# Altium PCB PCB1.PcbDoc (part 1 of 3)
Units mil, origin at the board's own origin, x right, y up, seen from the top; angles counter-clockwise.
Board outline 2830 x 1100 mil, 4 copper layers (L1, L2, L3, L4), stack 61.583 mil thick; 64 components, 73 nets, 315 pads, 162 vias.
Unrouted connection lines stored in the file: 1.
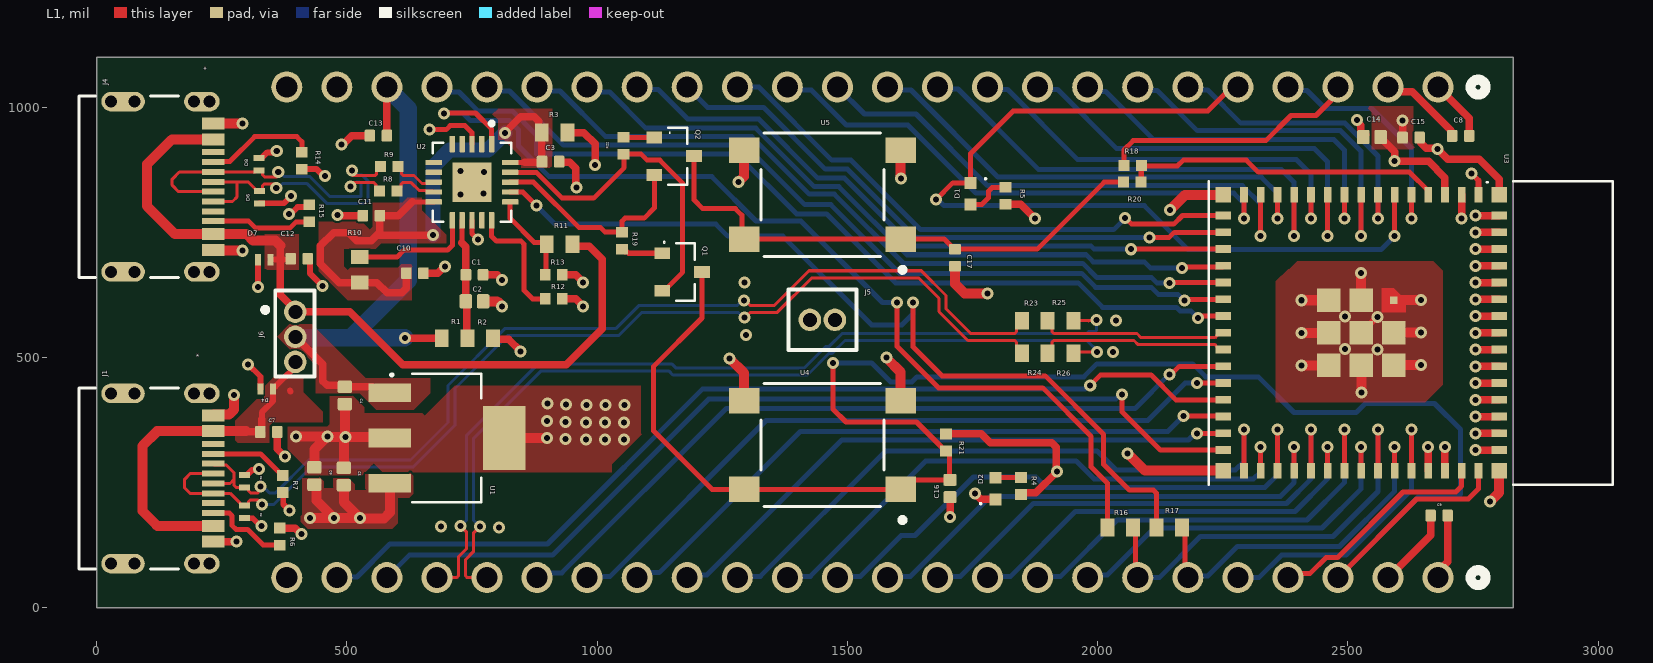
[diagram p0: L1 view]
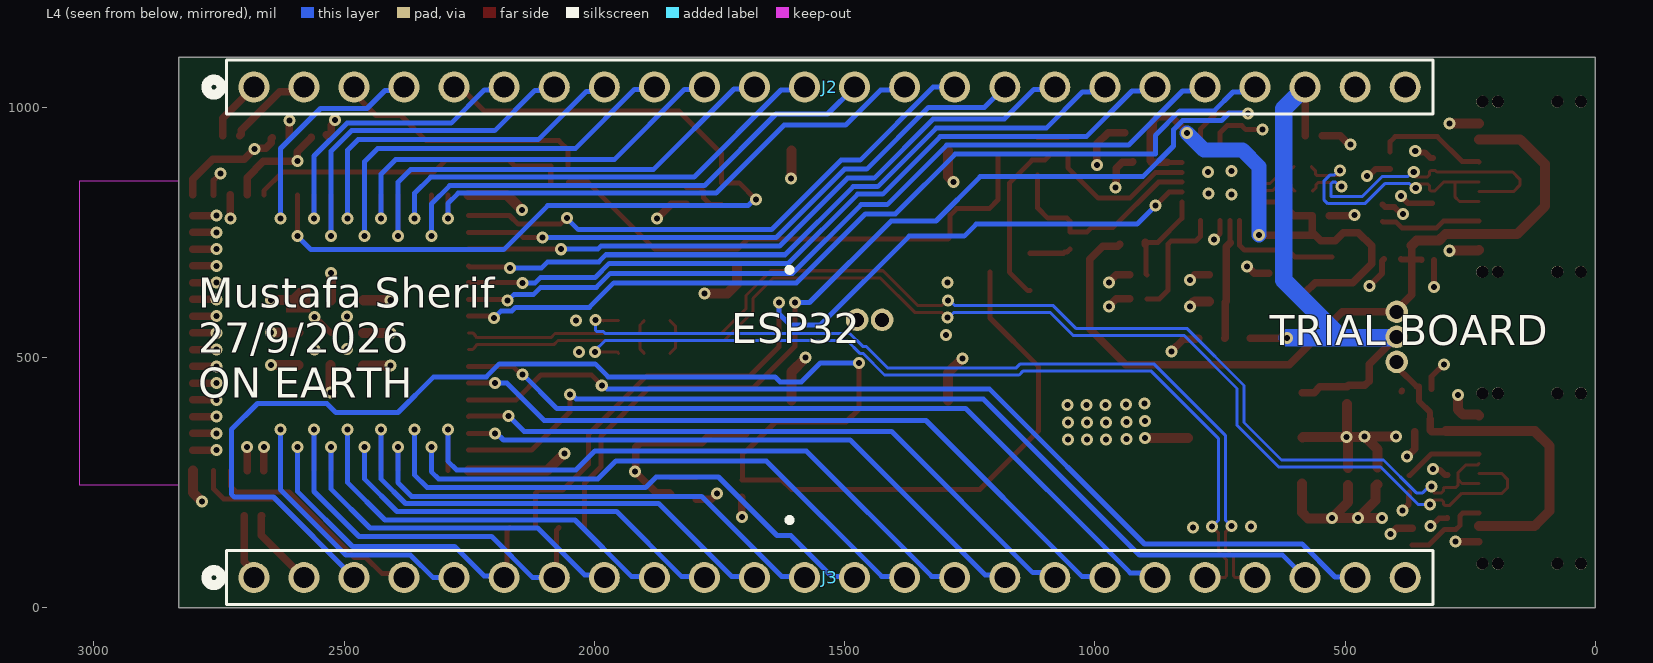
[diagram p1: L4 view, seen from below]
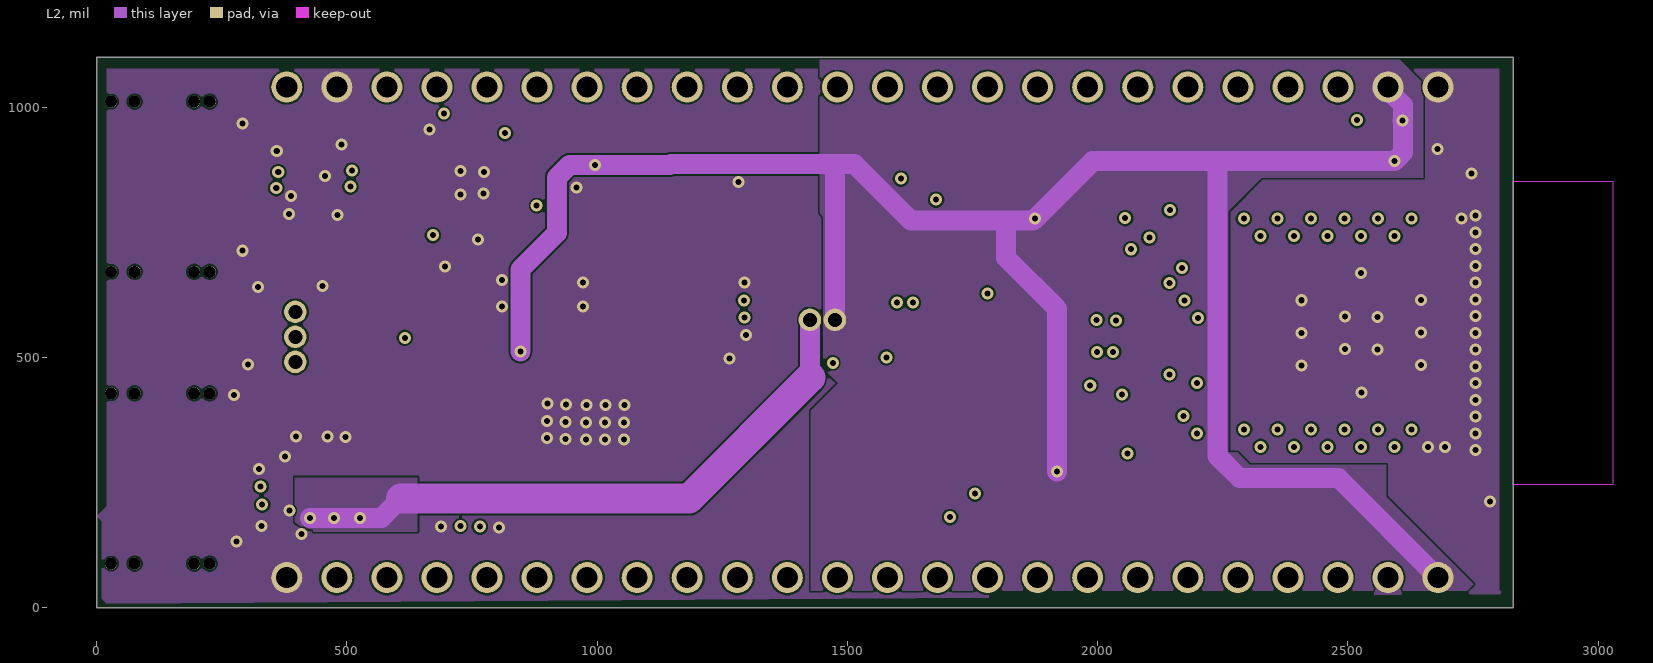
[diagram p2: L2]
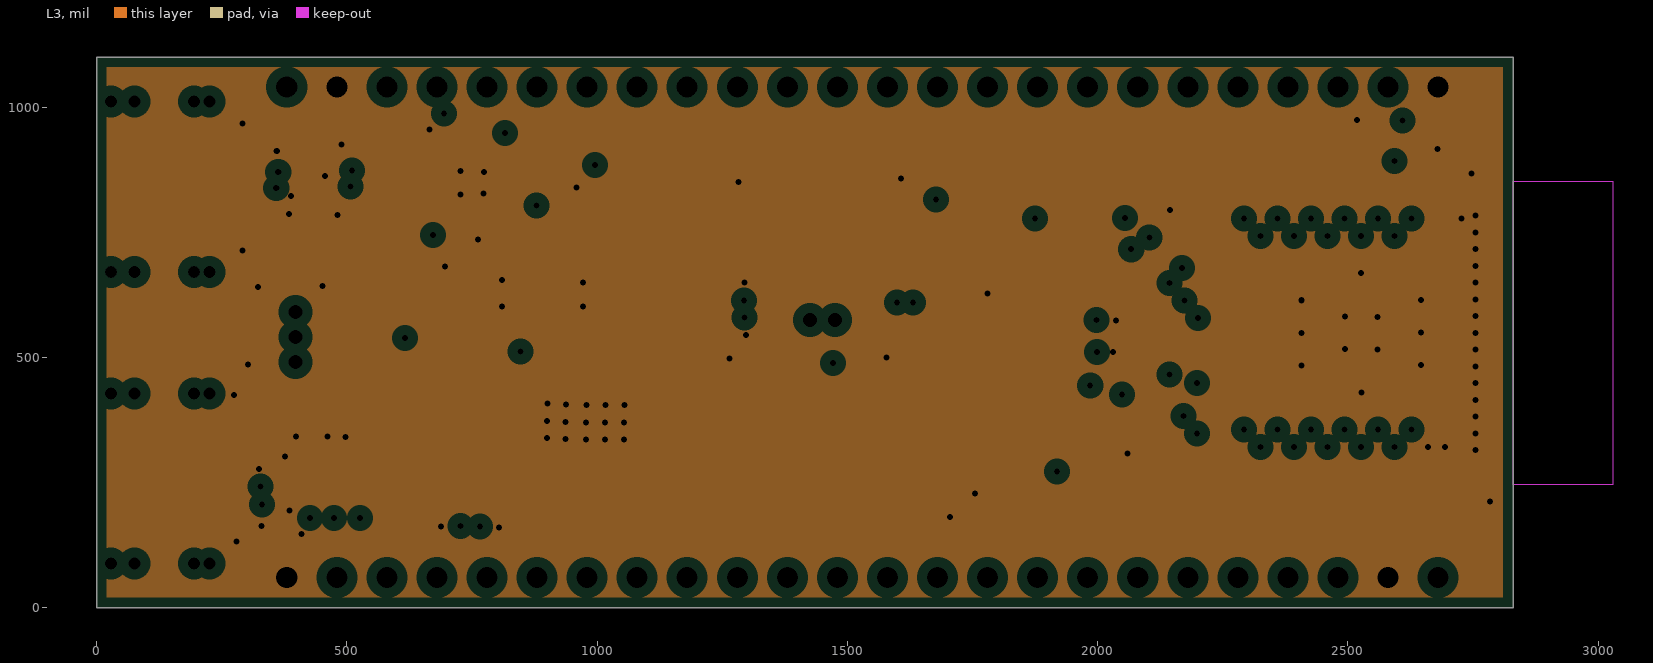
[diagram p3: L3, clearances drawn from the general rule]
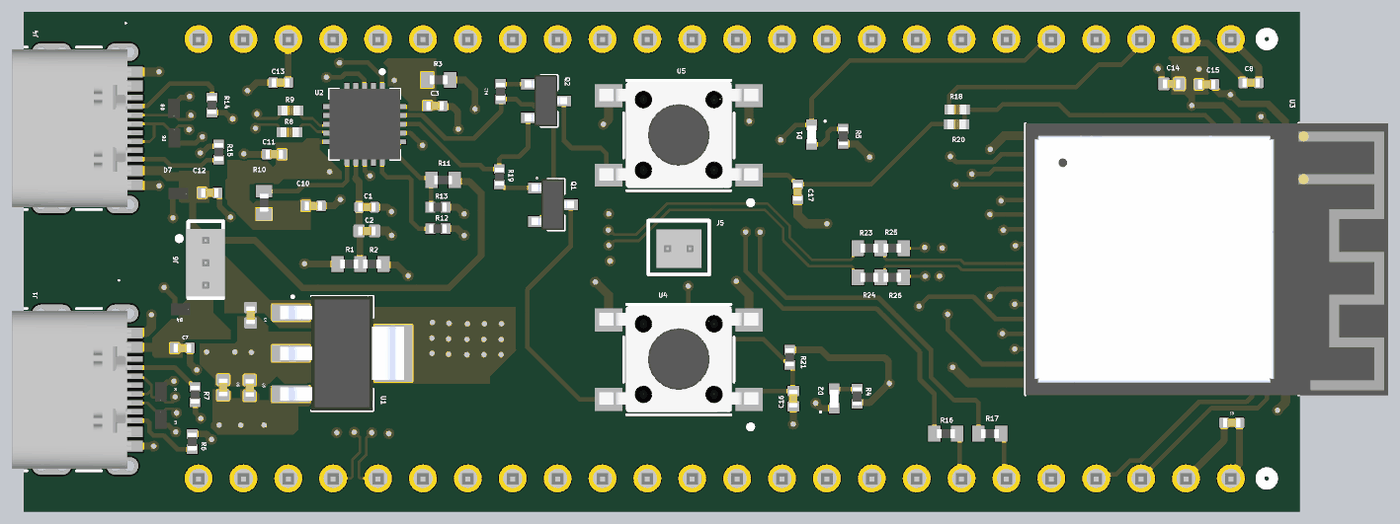
[diagram p4: 3D render of the assembled board from above, using the file's embedded part models]

## Layer stack, top to bottom
Top Solder: solder mask 0.4, Solder Resist, Dk 3.5
L1: signal copper 1.378
Dielectric 2: prepreg 3.9134, PP-006, Dk 4.1
L2: signal copper 0.5984
Dielectric 1: dielectric 49.8031, FR-4, Dk 4.8
L3: plane copper 0.5984, net GND
Dielectric 3: prepreg 3.9134, PP-006, Dk 4.1
L4: signal copper 1.378
Bottom Solder: solder mask 0.4, Solder Resist, Dk 3.5

## Board outline
0,0 2830,0 2830,1100 0,1100

## Design rules (kind name [scope] priority, off if disabled: settings)
Clearance [All] p1: gap=4 ignorepadtopadclearanceinfootprint=FALSE
DiffPairsRouting DIFF90 [InDifferentialPairClass('DIFF90')] p1: maxlimit=10 minlimit=8 mostfreqgap=10 toplayer_maxgap=8.1 toplayer_prefgap=8 toplayer_minwidth=6.03 toplayer_maxwidth=6.23 toplayer_prefwidth=6.03 midlayer1_mingap=10 midlayer1_minwidth=15 midlayer1_maxwidth=15 midlayer1_prefwidth=15 bottomlayer_maxgap=8.1 bottomlayer_prefgap=8 bottomlayer_minwidth=6.03 bottomlayer_maxwidth=6.23 bottomlayer_prefwidth=6.03 maxuncoupledlength=500
HoleToHoleClearance [All] p1: gap=6 allowstackedmicrovias=TRUE
MinimumSolderMaskSliver [All] p1: minsoldermaskwidth=4
PlaneClearance [All] p1: clearance=20
PlaneConnect [All] p1: pad.planeconnectstyle=Relief pad.reliefexpansion=20 pad.reliefentries=4 pad.reliefconductorwidth=10 pad.reliefairgap=10 via.planeconnectstyle=Direct via.reliefexpansion=20 via.reliefentries=4 via.reliefconductorwidth=10 via.reliefairgap=10
PolygonConnect [All] p1: connectstyle=Direct reliefconductorwidth=10 reliefentries=4 polygonreliefangle="90 Angle" airgapwidth=10
RoutingVias [All] p1: holewidth=12 width=24 viastyle="Through Hole" minholewidth=12 minwidth=24 maxholewidth=12 maxwidth=24
SilkToSolderMaskClearance [IsPad] p1: minsilkscreentomaskgap=6 clearancetoexposedcopper=TRUE
SolderMaskExpansion [All] p1: expansion=2 istentingtop=FALSE
Width [All] p1: maxlimit=100 minlimit=10 preferedwidth=10 minimp=50.000000 maximp=50.000000 favimp=50.000000
24 further rules are at their usual default settings.

## Classes and differential pairs
differential pair class DIFF90: CON1_USB CON2_USB CON_ESP_USB ESP_USB FTDI_USB
differential pair FTDI_USB: +FTDI_USB_P -FTDI_USB_N
differential pair ESP_USB: +ESP_USB_P -ESP_USB_N
differential pair CON_ESP_USB: +CON_ESP_USB_P -CON_ESP_USB_N
differential pair CON2_USB: +CON2_USB_P -CON2_USB_N
differential pair CON1_USB: +CON1_USB_P -CON1_USB_N

## Components (designator, comment, footprint, x,y, rotation, side; value= is the part's Value field where it differs from the comment)
C1 "100n" CAPC1005X55N 755,665 r180 top locked
C2 "4.7U" CAPC1005X70N#1 755,612 r180 top locked
C3 "100n" CAPC1005X55N 907,891 r180 top locked
C4 "4.7U" CAPC1005X70N#2 496,424 r90 top locked
C5 "10u" CAPC1005X90N 494,262 r270 top locked
C6 "10u" CAPC1005X90N 435,263 r270 top locked
C7 "100n" CAPC1005X55N 344,351 r180 top locked
C8 "100n" CAPC1005X55N 2725,942.36 r180 top locked
C9 "100n" CAPC1005X55N 2682,184 r0 top locked
C10 "100n" CAPC1005X55N 636,668 r180 top locked
C11 "100n" CAPC1005X55N 549,783 r0 top locked
C12 "100n" CAPC1005X55N 405,697 r180 top locked
C13 "100n" CAPC1005X55N 563,943 r0 top locked
C14 "10u" CAPC1005X90N 2548,940 r0 top locked
C15 "100n" CAPC1005X55N 2626,939 r180 top locked
C16 "1UF" CAPC1005X65N 1705,238 r90 top locked
C17 "100n" CAPC1005X55N 1715,699 r90 top locked
D1 "WL-SMCC_0402" WL-SMCC_0402 1746,827 r270 top locked
D2 "WL-SMCC_0402" WL-SMCC_0402 1796,238 r90 top locked
D3 "AQ3045-01ETG" TVS_SOD882_LTF 296,192 r270 top locked
D4 "AQ3045-01ETG" TVS_SOD882_LTF 340,437 r180 top locked
D5 "AQ3045-01ETG" TVS_SOD882_LTF 296,253 r90 top locked
D6 "AQ3045-01ETG" TVS_SOD882_LTF 326,820 r270 top locked
D7 "AQ3045-01ETG" TVS_SOD882_LTF 335,695 r180 top locked
D8 "AQ3045-01ETG" TVS_SOD882_LTF 325,886 r90 top locked
J1 "USBC-2171790001" USBC-2171790001 103,258 r270 top locked
J2 "22284245" CONN_SD-42375-001_M295_24_MOL 2680,1040 r0 bottom locked
J3 "22284245" CONN_SD-42375-001_M295_24_MOL 2680,60 r0 bottom locked
J4 "USBC-2171790001" USBC-2171790001 103.07,840.92 r270 top locked
J5 "SAMTEC-FTS-102-01-X-SJ" SAMTEC-FTS-102-01-X-S 1450,575 r0 top locked
J6 "SAMTEC-FTS-103-01-X-S" SAMTEC-FTS-103-01-X-S 397,541 r270 top locked
Q1 "SS8050-G" TRANS_SS8050-G 1169.76,670.6 r0 top locked
Q2 "SS8050-G" TRANS_SS8050-G 1154,902 r0 top locked
R1 "0R" RESC1005X40 715.41,538 r0 top locked value="0 ohms"
R2 "0R" RESC1005X40 766.59,538 r180 top locked value="0 ohms"
R3 "0R" RESC1005X40 915,949 r0 top locked value="0 ohms"
R4 "1K" RESC1005X40N 1847,243 r270 top locked
R5 "1K" RESC1005X40N 1816,823 r270 top locked
R6 "AC0402FR-075K1L" 5k1 366,142 r270 top locked
R7 "AC0402FR-075K1L" 5k1 372,247 r90 top locked
R8 "27R" RES_RC0402_YAG 583,832 r0 top locked
R9 "27R" RES_RC0402_YAG 585,881 r0 top locked
R10 "0R" RESC1005X40 526,675 r90 top locked value="0 ohms"
R11 "4K7" "RESC1005X40 - duplicate" 925,726 r0 top locked
R12 "10K" RESC1005X37N 913.27,617 r180 top locked
R13 "10K" RESC1005X37N 913.27,665 r180 top locked
R14 "AC0402FR-075K1L" 5k1 410,893 r90 top locked
R15 "AC0402FR-075K1L" 5k1 425,788 r270 top locked
R16 "0R" RESC1005X40 2045,160 r180 top locked value="0 ohms"
R17 "0R" RESC1005X40 2143,160 r180 top locked value="0 ohms"
R18 "27R" RES_RC0402_YAG 2070,883 r0 top locked
R19 "10K" RESC1005X37N 1050,733 r270 top locked
R20 "27R" RES_RC0402_YAG 2069,850 r0 top locked
R21 "10K" RESC1005X37N 1697,330 r90 top locked
R22 "10K" RESC1005X37N 1053,923 r90 top locked
R23 "0R" RESC1005X40 1874.21,573.2 r0 top locked value="0 ohms"
R24 "0R" RESC1005X40 1874.21,508.2 r0 top locked value="0 ohms"
R25 "0R" RESC1005X40 1925.95,573.2 r180 top locked value="0 ohms"
R26 "0R" RESC1005X40 1925.95,508.2 r180 top locked value="0 ohms"
U1 "TL1963A-33DCYR" VREG_TL1963A-33DCYR 700,339 r0 top locked
U2 "FT231XQ-R" QFN50P400X400X80-21N 750,850 r270 top locked
U3 "ESP32-S3-MINI-1-N8" ESP32-S3-MINI-1-N8 2526.41,549.14 r270 top locked
U4 "PTS645SM43SMTR92LFS" SWITCH_43SMTR92LFS 1450,325 r180 top locked
U5 "PTS645SM43SMTR92LFS" SWITCH_43SMTR92LFS 1450,825 r180 top locked

## Footprints (in the part's own frame and the unit in brackets; to place one, negate y for a bottom-side part, rotate by r counter-clockwise, add the part's x,y. Pads: shape width x height; smd on the part's side, far side on the other; paste and mask are expansions set on the pad)
5k1 [mm]
  rect 0.54x0.6 smd: 1(-0.432,0) 2(0.432,0)
  body extent -0.5,-0.25 0.5,0.25, height 0.37
CAPC1005X55N [mm]
  rrect25% 0.54x0.6 smd: 1(-0.432,0) 2(0.432,0)
  body extent -0.5,-0.25 0.5,0.25, height 0.55
CAPC1005X65N [mm]
  rrect25% 0.6x0.67 smd: 1(-0.437,0) 2(0.437,0)
  body extent -0.5,-0.25 0.5,0.25, height 0.65
CAPC1005X70N#1 [mm]
  rrect25% 0.64x0.72 smd paste+0 mask+0.025: 1(-0.439,0) 2(0.439,0)
  body extent -0.5,-0.25 0.5,0.25, height 0.7
CAPC1005X70N#2 [mm]
  rrect25% 0.64x0.72 smd paste+0 mask+0: 1(-0.439,0) 2(0.439,0)
  body extent -0.5,-0.25 0.5,0.25, height 0.7
CAPC1005X90N [mm]
  rrect25% 0.64x0.72 smd: 1(-0.439,0) 2(0.439,0)
  body extent -0.5,-0.25 0.5,0.25, height 0.9
CONN_SD-42375-001_M295_24_MOL [mil]
  round 62 hole 42: 1(0,0) 2(-100,0) 3(-200,0) 4(-300,0) 5(-400,0) 6(-500,0) 7(-600,0) 8(-700,0) 9(-800,0) 10(-900,0) 11(-1000,0) 12(-1100,0) 13(-1200,0) 14(-1300,0) 15(-1400,0) 16(-1500,0) 17(-1600,0) 18(-1700,0) 19(-1800,0) 20(-1900,0) 21(-2000,0) 22(-2100,0) 23(-2200,0) 24(-2300,0)
  silkscreen extent -2355,-54 95,54, body extent -2350,-48 50,50, height 387
ESP32-S3-MINI-1-N8 [mm]
  rect 0.8x0.4 smd: 1(-7,5.95) 2(-7,5.1) 3(-7,4.25) 4(-7,3.4) 5(-7,2.55) 6(-7,1.7) 7(-7,0.85) 8(-7,0) 9(-7,-0.85) 10(-7,-1.7) 11(-7,-2.55) 12(-7,-3.4) 13(-7,-4.25) 14(-7,-5.1) 15(-7,-5.95) 31(7,-5.95) 32(7,-5.1) 33(7,-4.25) 34(7,-3.4) 35(7,-2.55) 36(7,-1.7) 37(7,-0.85) 38(7,0) 39(7,0.85) 40(7,1.7) 41(7,2.55) 42(7,3.4) 43(7,4.25) 44(7,5.1) 45(7,5.95)
  rect 0.4x0.8 smd: 16(-5.95,-7) 17(-5.1,-7) 18(-4.25,-7) 19(-3.4,-7) 20(-2.55,-7) 21(-1.7,-7) 22(-0.85,-7) 23(0,-7) 24(0.85,-7) 25(1.7,-7) 26(2.55,-7) 27(3.4,-7) 28(4.25,-7) 29(5.1,-7) 30(5.95,-7) 46(5.95,7) 47(5.1,7) 48(4.25,7) 49(3.4,7) 50(2.55,7) 51(1.7,7) 52(0.85,7) 53(0,7) 54(-0.85,7) 55(-1.7,7) 56(-2.55,7) 57(-3.4,7) 58(-4.25,7) 59(-5.1,7) 60(-5.95,7)
  rect 1.2x1.2 smd: 61(0,0) 61_2(0,1.65) 61_3(1.65,1.65) 61_4(1.65,0) 61_5(1.65,-1.65) 61_6(0,-1.65) 61_7(-1.65,-1.65) 61_8(-1.65,0)
  rect 0.4x0.4 smd paste-1 mask+0: 61_1(-1.65,1.65)
  rect 0.8x0.8 smd: 62(-7,7) 63(-7,-7) 64(7,-7) 65(7,7)
  L1 region: -1.05,1.05 -2.25,1.05 -2.25,1.65 -1.65,2.25 -1.05,2.25
  Keep-Out Layer region: 7.7,7.725 -7.7,7.725 -7.7,12.775 7.7,12.775
  Keep-Out Layer region: 7.7,7.725 -7.7,7.725 -7.7,12.775 7.7,12.775
  silkscreen extent -7.7,-7.73 7.7,12.78, body extent -7.7,-7.71 7.7,12.79, height 2.55
QFN50P400X400X80-21N [mm]
  rrect25% 0.84x0.27 smd: 1(-1.935,1) 2(-1.935,0.5) 3(-1.935,0) 4(-1.935,-0.5) 5(-1.935,-1) 11(1.935,-1) 12(1.935,-0.5) 13(1.935,0) 14(1.935,0.5) 15(1.935,1)
  rrect25% 0.27x0.84 smd: 6(-1,-1.935) 7(-0.5,-1.935) 8(0,-1.935) 9(0.5,-1.935) 10(1,-1.935) 16(1,1.935) 17(0.5,1.935) 18(0,1.935) 19(-0.5,1.935) 20(-1,1.935)
  rect 2x2 smd paste-0.37: 21(0,0)
  silkscreen extent -3.07,-2 2,2, body extent -2,-2 2,2, height 0.78
RES_RC0402_YAG [mil]
  rect 22x22 smd paste+0 mask+0: 1(-17.5,0) 2(17.5,0)
  body extent -21,-11 21,11, height 16
RESC1005X37N [mm]
  rect 0.54x0.6 smd: 1(-0.432,0) 2(0.432,0)
  body extent -0.5,-0.25 0.5,0.25, height 0.37
RESC1005X40 [mm]
  rect 0.7x0.9 smd: 1(-0.65,0) 2(0.65,0)
  body extent -0.5,-0.25 0.5,0.25, height 0.4
"RESC1005X40 - duplicate" [mm]
  rect 0.7x0.9 smd: 1(-0.65,0) 2(0.65,0)
  body extent -0.5,-0.25 0.5,0.25, height 0.4
RESC1005X40N [mm]
  rect 0.54x0.6 smd: 1(-0.43,0) 2(0.43,0)
  body extent -0.5,-0.25 0.5,0.25, height 0.4
SAMTEC-FTS-102-01-X-S [mil]
  round 45 hole 27.95 mask+4: 1(-25,0) 2(25,0)
  silkscreen extent -68,-60 68,60, body extent -50,-45 50,40, height 154
SAMTEC-FTS-103-01-X-S [mil]
  round 45 hole 27.95 mask+0: 1(-50,0) 2(0,0) 3(50,0)
  silkscreen extent -93,-65 79,38, body extent -75,-44 75,42, height 154
SWITCH_43SMTR92LFS [mil]
  rect 61x51 smd paste+0 mask+0: 1(-156.5,88.58) 2(156.5,88.58) 3(-156.5,-88.58) 4(156.5,-88.58)
  silkscreen extent -165,-123 123,155, body extent -177,-119 177,117, height 169
TRANS_SS8050-G [mm]
  rect 0.8x0.6 smd: 1(-1.01,0.95) 2(-1.01,-0.95) 3(1.01,0)
  silkscreen extent -0.95,-1.45 0.65,1.55, body extent -1.2,-1.44 1.2,1.46, height 1.14
TVS_SOD882_LTF [mil]
  rect 12x22 smd paste+0 mask+0: 1(-12.5,0) 2(12.5,0)
  body extent -21,-13 21,13, height 22
USBC-2171790001 [mil]
  oval 39x87 smd paste+0 mask+4.02: 13(-170.08,-50.07) 14(170.08,-50.07)
  oval 39x71 smd paste+0 mask+4.02: 15(-170.08,107.41) 16(170.08,107.41)
  rect 24x45 smd paste+0 mask+4.02: A1/B12(-125.98,130.05) A4/B9(-94.49,130.05) B1/A12(125.98,130.05) B4/A9(94.49,130.05)
  rect 12x45 smd paste+0 mask+4.02: A5(-49.21,130.05) A6(-9.84,130.05) A7(9.84,130.05) A8(49.21,130.05) B5(68.9,130.05) B6(29.53,130.05) B7(-29.53,130.05) B8(-68.9,130.05)
  round 24 hole 24 unplated mask+0: ""(-170,92) ""(-170,123) ""(-170,-74) ""(-170,-27) ""(170,92) ""(170,123) ""(170,-74) ""(170,-27)
  silkscreen extent -181,-138 181,61, body extent -176,-138 176,128, height 128
VREG_TL1963A-33DCYR [mm]
  rect 2.15x0.95 smd: 1(-2.9,2.3) 2(-2.9,0) 3(-2.9,-2.3)
  rect 2.15x3.25 smd: 4(2.9,0)
  silkscreen extent -2.83,-3.25 1.75,3.25, body extent -3.5,-3.25 3.5,3.25, height 1.8
WL-SMCC_0402 [mm]
  rect 0.6x0.6 smd: 1(-0.55,0) 2(0.55,0)
  silkscreen extent -0.76,0.76 -0.76,0.76, body extent -0.5,-0.25 0.5,0.25, height 0.25

## Part data
C1 C3 C7 C8 C9 C10 C11 C12 C13 C15 C17: library part CL05B104KB54PNC, "CAP CER 0.1UF 50V X7R 0402 SMD", Capacitance=100nF, Case/Package=0402, Dielectric Material=Ceramic, Manufacturer="Samsung Electro-Mechanics", Max Operating Temperature=125°C, Min Operating Temperature=-55°C, Package="SMD-2 Samsung", Ratings=AEC-Q200, Tolerance=10%, Voltage Rating=50V, Category="Ceramic Capacitors", Check_prices=https://www.snapeda.com/parts/CL05B104KB54PNC/Samsung/view-part/?ref=eda, China RoHS=Compliant, ComponentLink1Description=https://datasheet.octopart.com:443/CL05B104KB54PNC-Samsung-Electro-Mechanics-datasheet-182018727.pdf?src-supplier=IHS, ComponentLink1URL=https://datasheet.octopart.com:443/CL05B104KB54PNC-Samsung-Electro-Mechanics-datasheet-182018727.pdf?src-supplier=IHS, ComponentLink2Description=https://datasheet.octopart.com:443/CL05B104KB54PNC-Samsung-Electro-Mechanics-datasheet-138685816.pdf?src-supplier=Samsung+SCT, ComponentLink2URL=https://datasheet.octopart.com:443/CL05B104KB54PNC-Samsung-Electro-Mechanics-datasheet-138685816.pdf?src-supplier=Samsung+SCT, ComponentLink3Description=https://datasheet.octopart.com:443/CL05B104KB54PNC-Samsung-datasheet-8326407.pdf?src-supplier=TME, ComponentLink3URL=https://datasheet.octopart.com:443/CL05B104KB54PNC-Samsung-datasheet-8326407.pdf?src-supplier=TME, Country of Origin="Mainland China, Philippines, South Korea", Export Control Classification Number (ECCN) Code=EAR99, Harmonized Tariff Schedule (HTS) Code=8532.24.00.20, Height=500µm, Introduction Date=2018-07-31, Length=1mm, Lifecycle Status=Production, Manufacturer Part Number=CL05B104KB54PNC, Material=Ceramic, MF="Samsung Electro-Mechanics", Mount="Surface Mount", MP=CL05B104KB54PNC, Number of Terminals=2, Pricing 1="10000=0.0126, 20000=0.0124, 40000=0.0123, 50000=0.0122, 150000=0.0118 (USD)", REACH SVHC=Yes, RoHS=Compliant, Schedule B="8532240020, 8532240020|8532240020|8532240020|8532240020|8532240020|8532240020|8532240020|8532240020|8532240020|8532240020|8532240020|8532240020|8532240020|8532240020|8532240020|8532240020|8532240020|8532240020|8532240020|8532240020|8532240020|8532240020|8532240020|85", SnapEDA_Link=https://www.snapeda.com/parts/CL05B104KB54PNC/Samsung/view-part/?ref=snap, Stock 1=1410000, Supplier 1="Future Electronics", Voltage Rating (DC)=50V, Width=500µm
C2 C4: library part 4.7uf-CL05A475MO5NUNC, "16V 4.7uF X5R 卤20% 0402 Multilayer Ceramic Capacitors MLCC - SMD/SMT ROHS", Capacitance=4.7µF, Case Code (Imperial)=0402, Case Code (Metric)=1005, Dielectric=X5R, Dielectric Material=Ceramic, Manufacturer="Samsung Electro-Mechanics", Manufacturer Part Number=CL05A475MO5NUNC, Max Operating Temperature=85°C, Min Operating Temperature=-55°C, Package="SMD-2 Samsung", Tolerance=20%, Voltage Rating=16V, Case/Package=0402, Category="Ceramic Capacitors", Check_prices=https://www.snapeda.com/parts/CL05A475MO5NUNC/Samsung/view-part/?ref=eda, China RoHS=Compliant, ComponentLink1Description=https://datasheet.octopart.com:443/CL05A475MO5NUNC-Samsung-Electro-Mechanics-datasheet-178175196.pdf?src-supplier=Farnell, ComponentLink1URL=https://datasheet.octopart.com:443/CL05A475MO5NUNC-Samsung-Electro-Mechanics-datasheet-178175196.pdf?src-supplier=Farnell, ComponentLink2Description=https://datasheet.octopart.com:443/CL05A475MO5NUNC-Samsung-Electro-Mechanics-datasheet-123102911.pdf?src-supplier=Future+Electronics, ComponentLink2URL=https://datasheet.octopart.com:443/CL05A475MO5NUNC-Samsung-Electro-Mechanics-datasheet-123102911.pdf?src-supplier=Future+Electronics, ComponentLink3Description=https://datasheet.octopart.com:443/CL05A475MO5NUNC-Samsung-Electro-Mechanics-datasheet-110226225.pdf?src-supplier=Future+Electronics, ComponentLink3URL=https://datasheet.octopart.com:443/CL05A475MO5NUNC-Samsung-Electro-Mechanics-datasheet-110226225.pdf?src-supplier=Future+Electronics, ComponentLink4Description=https://datasheet.octopart.com:443/CL05A475MO5NUNC-Samsung-Electro-Mechanics-datasheet-83567908.pdf?src-supplier=Future+Electronics, ComponentLink4URL=https://datasheet.octopart.com:443/CL05A475MO5NUNC-Samsung-Electro-Mechanics-datasheet-83567908.pdf?src-supplier=Future+Electronics, ComponentLink5Description=https://datasheet.octopart.com:443/CL05A475MO5NUNC-Samsung-Electro-Mechanics-datasheet-68297032.pdf?src-supplier=Future+Electronics, ComponentLink5URL=https://datasheet.octopart.com:443/CL05A475MO5NUNC-Samsung-Electro-Mechanics-datasheet-68297032.pdf?src-supplier=Future+Electronics, ComponentLink6Description=https://datasheet.octopart.com:443/CL05A475MO5NUNC-Samsung-Electro-Mechanics-datasheet-87580057.pdf?src-supplier=Future+Electronics, ComponentLink6URL=https://datasheet.octopart.com:443/CL05A475MO5NUNC-Samsung-Electro-Mechanics-datasheet-87580057.pdf?src-supplier=Future+Electronics, ComponentLink7Description=https://datasheet.octopart.com:443/CL05A475MO5NUNC-Samsung-Electro-Mechanics-datasheet-149136694.pdf?src-supplier=Future+Electronics, ComponentLink7URL=https://datasheet.octopart.com:443/CL05A475MO5NUNC-Samsung-Electro-Mechanics-datasheet-149136694.pdf?src-supplier=Future+Electronics, Height=500µm, Length=1mm, Lifecycle Status=Production, Material=Ceramic, MF=Samsung, Mount="Surface Mount", MP=CL05A475MO5NUNC, Number of Terminals=2, Pricing 1="10000=0.665 (USD)", REACH SVHC=Yes, RoHS=Compliant, Schedule B="8532240020, 8532240020|8532240020, 8532240020|8532240020|8532240020, 8532240020|8532240020|8532240020|8532240020", SnapEDA_Link=https://www.snapeda.com/parts/CL05A475MO5NUNC/Samsung/view-part/?ref=snap, Stock 1=50000, Supplier 1="Future Electronics", Thickness=558.8µm, Voltage Rating (DC)=16V, Width=500µm
C5 C6: library part 10UF, "CL05A106MP8NUB8-CAP CER 10UF 10V X5R 0402 SMD", Capacitance=10µF, Case Code (Imperial)=0402, Case Code (Metric)=1005, Dielectric Material=Ceramic, Manufacturer="Samsung Electro-Mechanics", Manufacturer Part Number=CL05A106MP8NUB8, Max Operating Temperature=85°C, Min Operating Temperature=-55°C, Package="SMD-2 Samsung", Tolerance=20%, Voltage Rating=10V, Case/Package=0402, Category="Ceramic Capacitors", Check_prices=https://www.snapeda.com/parts/CL05A106MP8NUB8/Samsung/view-part/?ref=eda, China RoHS=Compliant, ComponentLink1Description=https://datasheet.octopart.com:443/CL05A106MP8NUB8-Samsung-Electro-Mechanics-datasheet-136460857.pdf?src-supplier=IHS, ComponentLink1URL=https://datasheet.octopart.com:443/CL05A106MP8NUB8-Samsung-Electro-Mechanics-datasheet-136460857.pdf?src-supplier=IHS, ComponentLink2Description=https://datasheet.octopart.com:443/CL05A106MP8NUB8-Samsung-Electro-Mechanics-datasheet-181551178.pdf?src-supplier=Newark, ComponentLink2URL=https://datasheet.octopart.com:443/CL05A106MP8NUB8-Samsung-Electro-Mechanics-datasheet-181551178.pdf?src-supplier=Newark, ComponentLink3Description=https://datasheet.octopart.com:443/CL05A106MP8NUB8-Samsung-Electro-Mechanics-datasheet-136031724.pdf?src-supplier=Newark, ComponentLink3URL=https://datasheet.octopart.com:443/CL05A106MP8NUB8-Samsung-Electro-Mechanics-datasheet-136031724.pdf?src-supplier=Newark, ComponentLink4Description=https://datasheet.octopart.com:443/CL05A106MP8NUB8-Samsung-Electro-Mechanics-datasheet-141346815.pdf?src-supplier=Samsung+SCT, ComponentLink4URL=https://datasheet.octopart.com:443/CL05A106MP8NUB8-Samsung-Electro-Mechanics-datasheet-141346815.pdf?src-supplier=Samsung+SCT, ComponentLink5Description=https://datasheet.octopart.com:443/CL05A106MP8NUB8-Samsung-Electro-Mechanics-datasheet-110326781.pdf?src-supplier=Future+Electronics, ComponentLink5URL=https://datasheet.octopart.com:443/CL05A106MP8NUB8-Samsung-Electro-Mechanics-datasheet-110326781.pdf?src-supplier=Future+Electronics, ComponentLink6Description=https://datasheet.octopart.com:443/CL05A106MP8NUB8-Samsung-Electro-Mechanics-datasheet-96443587.pdf?src-supplier=Future+Electronics, ComponentLink6URL=https://datasheet.octopart.com:443/CL05A106MP8NUB8-Samsung-Electro-Mechanics-datasheet-96443587.pdf?src-supplier=Future+Electronics, ComponentLink7Description=https://datasheet.octopart.com:443/CL05A106MP8NUB8-Samsung-Electro-Mechanics-datasheet-68297032.pdf?src-supplier=Future+Electronics, ComponentLink7URL=https://datasheet.octopart.com:443/CL05A106MP8NUB8-Samsung-Electro-Mechanics-datasheet-68297032.pdf?src-supplier=Future+Electronics, ComponentLink8Description=https://datasheet.octopart.com:443/CL05A106MP8NUB8-Samsung-Electro-Mechanics-datasheet-86032222.pdf?src-supplier=Future+Electronics, ComponentLink8URL=https://datasheet.octopart.com:443/CL05A106MP8NUB8-Samsung-Electro-Mechanics-datasheet-86032222.pdf?src-supplier=Future+Electronics, Country of Origin="Mainland China, Philippines, South Korea", Export Control Classification Number (ECCN) Code=EAR99, Harmonized Tariff Schedule (HTS) Code=8532.24.00.20, Height=800µm, Introduction Date=2014-02-27, Length=1mm, Lifecycle Status=Production, Material=Ceramic, MF="Samsung Electro-Mechanics", Mount="Surface Mount", MP=CL05A106MP8NUB8, Number of Terminals=2, Pricing 1="8000=0.245 (USD)", REACH SVHC=Yes, RoHS=Compliant, Schedule B="8532240020, 8532240020|8532240020, 8532240020|8532240020|8532240020, 8532240020|8532240020|8532240020|8532240020", SnapEDA_Link=https://www.snapeda.com/parts/CL05A106MP8NUB8/Samsung/view-part/?ref=snap, Stock 1=264000, Supplier 1="Future Electronics", Thickness=889µm, Voltage Rating (DC)=10V, Width=500µm
C14: library part CL05A106MP8NUB8, "CAP CER 10UF 10V X5R 0402 SMD", Capacitance=10µF, Case Code (Imperial)=0402, Case Code (Metric)=1005, Dielectric Material=Ceramic, Manufacturer="Samsung Electro-Mechanics", Max Operating Temperature=85°C, Min Operating Temperature=-55°C, Package="SMD-2 Samsung", Tolerance=20%, Voltage Rating=10V, Case/Package=0402, Category="Ceramic Capacitors", Check_prices=https://www.snapeda.com/parts/CL05A106MP8NUB8/Samsung/view-part/?ref=eda, China RoHS=Compliant, ComponentLink1Description=https://datasheet.octopart.com:443/CL05A106MP8NUB8-Samsung-Electro-Mechanics-datasheet-136460857.pdf?src-supplier=IHS, ComponentLink1URL=https://datasheet.octopart.com:443/CL05A106MP8NUB8-Samsung-Electro-Mechanics-datasheet-136460857.pdf?src-supplier=IHS, ComponentLink2Description=https://datasheet.octopart.com:443/CL05A106MP8NUB8-Samsung-Electro-Mechanics-datasheet-181551178.pdf?src-supplier=Newark, ComponentLink2URL=https://datasheet.octopart.com:443/CL05A106MP8NUB8-Samsung-Electro-Mechanics-datasheet-181551178.pdf?src-supplier=Newark, ComponentLink3Description=https://datasheet.octopart.com:443/CL05A106MP8NUB8-Samsung-Electro-Mechanics-datasheet-136031724.pdf?src-supplier=Newark, ComponentLink3URL=https://datasheet.octopart.com:443/CL05A106MP8NUB8-Samsung-Electro-Mechanics-datasheet-136031724.pdf?src-supplier=Newark, ComponentLink4Description=https://datasheet.octopart.com:443/CL05A106MP8NUB8-Samsung-Electro-Mechanics-datasheet-141346815.pdf?src-supplier=Samsung+SCT, ComponentLink4URL=https://datasheet.octopart.com:443/CL05A106MP8NUB8-Samsung-Electro-Mechanics-datasheet-141346815.pdf?src-supplier=Samsung+SCT, ComponentLink5Description=https://datasheet.octopart.com:443/CL05A106MP8NUB8-Samsung-Electro-Mechanics-datasheet-110326781.pdf?src-supplier=Future+Electronics, ComponentLink5URL=https://datasheet.octopart.com:443/CL05A106MP8NUB8-Samsung-Electro-Mechanics-datasheet-110326781.pdf?src-supplier=Future+Electronics, ComponentLink6Description=https://datasheet.octopart.com:443/CL05A106MP8NUB8-Samsung-Electro-Mechanics-datasheet-96443587.pdf?src-supplier=Future+Electronics, ComponentLink6URL=https://datasheet.octopart.com:443/CL05A106MP8NUB8-Samsung-Electro-Mechanics-datasheet-96443587.pdf?src-supplier=Future+Electronics, ComponentLink7Description=https://datasheet.octopart.com:443/CL05A106MP8NUB8-Samsung-Electro-Mechanics-datasheet-68297032.pdf?src-supplier=Future+Electronics, ComponentLink7URL=https://datasheet.octopart.com:443/CL05A106MP8NUB8-Samsung-Electro-Mechanics-datasheet-68297032.pdf?src-supplier=Future+Electronics, ComponentLink8Description=https://datasheet.octopart.com:443/CL05A106MP8NUB8-Samsung-Electro-Mechanics-datasheet-86032222.pdf?src-supplier=Future+Electronics, ComponentLink8URL=https://datasheet.octopart.com:443/CL05A106MP8NUB8-Samsung-Electro-Mechanics-datasheet-86032222.pdf?src-supplier=Future+Electronics, Country of Origin="Mainland China, Philippines, South Korea", Export Control Classification Number (ECCN) Code=EAR99, Harmonized Tariff Schedule (HTS) Code=8532.24.00.20, Height=800µm, Introduction Date=2014-02-27, Length=1mm, Lifecycle Status=Production, Manufacturer Part Number=CL05A106MP8NUB8, Material=Ceramic, MF="Samsung Electro-Mechanics", Mount="Surface Mount", MP=CL05A106MP8NUB8, Number of Terminals=2, Pricing 1="8000=0.245 (USD)", REACH SVHC=Yes, RoHS=Compliant, Schedule B="8532240020, 8532240020|8532240020, 8532240020|8532240020|8532240020, 8532240020|8532240020|8532240020|8532240020", SnapEDA_Link=https://www.snapeda.com/parts/CL05A106MP8NUB8/Samsung/view-part/?ref=snap, Stock 1=264000, Supplier 1="Future Electronics", Thickness=889µm, Voltage Rating (DC)=10V, Width=500µm
C16: "35V 1uF X5R 卤10% 0402 Multilayer Ceramic Capacitors MLCC - SMD/SMT ROHS", Capacitance=1µF, Case Code (Imperial)=0402, Case Code (Metric)=1005, Dielectric Material=Ceramic, Manufacturer="Samsung Electro-Mechanics", Manufacturer Part Number=CL05A105KL5NRNC, Max Operating Temperature=85°C, Min Operating Temperature=-55°C, Package="SMD-2 Samsung", Tolerance=10%, Voltage Rating=35V, Case/Package=0402, Category="Ceramic Capacitors", Check_prices=https://www.snapeda.com/parts/CL05A105KL5NRNC/Samsung/view-part/?ref=eda, China RoHS=Compliant, ComponentLink1Description=https://datasheet.octopart.com:443/CL05A105KL5NRNC-Samsung-Electro-Mechanics-datasheet-182018568.pdf?src-supplier=IHS, ComponentLink1URL=https://datasheet.octopart.com:443/CL05A105KL5NRNC-Samsung-Electro-Mechanics-datasheet-182018568.pdf?src-supplier=IHS, ComponentLink2Description=https://datasheet.octopart.com:443/CL05A105KL5NRNC-Samsung-Electro-Mechanics-datasheet-141346806.pdf?src-supplier=Samsung+SCT, ComponentLink2URL=https://datasheet.octopart.com:443/CL05A105KL5NRNC-Samsung-Electro-Mechanics-datasheet-141346806.pdf?src-supplier=Samsung+SCT, ComponentLink3Description=https://datasheet.octopart.com:443/CL05A105KL5NRNC-Samsung-datasheet-8326407.pdf?src-supplier=TME, ComponentLink3URL=https://datasheet.octopart.com:443/CL05A105KL5NRNC-Samsung-datasheet-8326407.pdf?src-supplier=TME, Country of Origin="Mainland China, Philippines, South Korea", Export Control Classification Number (ECCN) Code=EAR99, Harmonized Tariff Schedule (HTS) Code=8532.24.00.20, Height=550µm, Introduction Date=2013-03-18, Length=990.6µm, Lifecycle Status=Production, Material=Ceramic, MF=Samsung, Mount="Surface Mount", MP=CL05A105KL5NRNC, Number of Terminals=2, Pricing 1="10000=0.172 (USD)", REACH SVHC=Yes, RoHS=Compliant, Schedule B="8532240020, 8532240020|8532240020|8532240020|8532240020|8532240020", SnapEDA_Link=https://www.snapeda.com/parts/CL05A105KL5NRNC/Samsung/view-part/?ref=snap, Stock 1=20000, Supplier 1="Future Electronics", Thickness=558.8µm, Voltage Rating (DC)=35V, Width=508µm
D1 D2: "LED, GREEN, 60MCD, 573NM, 0402; LED Colour:Green; LED Mounting:SMD; Forward Current If:20mA; Forward Voltage:2V; Wavelength Typ:573nm; Luminous Intensity:60mcd; Viewing Angle:120Â°; Lens Shape:Rectangular; Product Range:WL-SMCC Series; Automotive Qualific", Package=None, Availability=Unavailable, Check_prices=https://www.snapeda.com/parts/150040VS73220/W%25C3%25BCrth+Elektronik+Midcom/view-part/?ref=eda, MF="WÃ¼rth Elektronik", MP=150040VS73220, Price=None, SnapEDA_Link=https://www.snapeda.com/parts/150040VS73220/W%25C3%25BCrth+Elektronik+Midcom/view-part/?ref=snap
D3 D4 D5 D6 D7 D8: library part TVS-AQ3045-01ETG, "TVS DIODE 12VC 3A SOD882 / ESD Suppressor TVS Bi-Dir 5.3V Automotive 2-Pin SOD-882 T/R", Breakdown Voltage=7.8V, Clamping Voltage=12V, Leakage Current=100nA, Manufacturer=Littelfuse, Manufacturer_Name="Littelfuse Inc", Max Breakdown Voltage=9V, Max Operating Temperature=150°C, Min Breakdown Voltage=6.8V, Min Operating Temperature=-40°C, Operating Supply Voltage=5.3V, Peak Pulse Power=40W, Ratings=AEC-Q101, Category="TVS Diodes", ComponentLink1Description=https://datasheet.octopart.com:443/AQ3045-01ETG-Littelfuse-datasheet-180606588.pdf?src-supplier=IHS, ComponentLink1URL=https://datasheet.octopart.com:443/AQ3045-01ETG-Littelfuse-datasheet-180606588.pdf?src-supplier=IHS, ComponentLink2Description=https://datasheet.octopart.com:443/AQ3045-01ETG-Littelfuse-datasheet-140480283.pdf?src-supplier=ODG+(Origin+Data+Global), ComponentLink2URL=https://datasheet.octopart.com:443/AQ3045-01ETG-Littelfuse-datasheet-140480283.pdf?src-supplier=ODG+(Origin+Data+Global), ComponentLink3Description=https://datasheet.octopart.com:443/AQ3045-01ETG-Littelfuse-datasheet-101609968.pdf?src-supplier=Farnell, ComponentLink3URL=https://datasheet.octopart.com:443/AQ3045-01ETG-Littelfuse-datasheet-101609968.pdf?src-supplier=Farnell, ComponentLink4Description=https://datasheet.octopart.com:443/AQ3045-01ETG-Littelfuse-datasheet-183003566.pdf?src-supplier=JRH+Electronics, ComponentLink4URL=https://datasheet.octopart.com:443/AQ3045-01ETG-Littelfuse-datasheet-183003566.pdf?src-supplier=JRH+Electronics, ComponentLink5Description=https://datasheet.octopart.com:443/AQ3045-01ETG-Littelfuse-datasheet-170904929.pdf?src-supplier=Future+Electronics, ComponentLink5URL=https://datasheet.octopart.com:443/AQ3045-01ETG-Littelfuse-datasheet-170904929.pdf?src-supplier=Future+Electronics, Copyright="Copyright (C) 2025 Ultra Librarian. All rights reserved.", Lifecycle Status=Production, Manufacturer Part Number=AQ3045-01ETG, Manufacturer_Part_Number=AQ3045-01ETG, Mount="Surface Mount", Number of Channels=1, Number of Elements=1, Number of Terminals=2, Packaging="Cut Tape", Peak Reverse Current=100nA, Polarity=Bidirectional, Pricing 1="10000=0.116 (USD)", REACH SVHC=Yes, RefDes=RefDes, Reverse Standoff Voltage=5.3V, RoHS=Compliant, Stock 1=260000, Supplier 1="Arrow Electronics", Type=Type
J1 J4: "USB Connector, 16 Contact(s), Female, Right Angle, Surface Mount Terminal, Locking, Receptacle", Contact Resistance=50mΩ, Current Rating=1.25A, Dielectric Material=Polyamide, Insulation Color=Black, Insulation Resistance=100MΩ, Manufacturer=Molex, Manufacturer Lifecycle Status=ACTIVE, Manufacturer Part Number=217179-0001, Max Operating Temperature=85°C, Min Operating Temperature=-40°C, Package=None, Voltage Rating=30V, Availability=Unavailable, Category="USB Connectors", China RoHS=Compliant, ComponentLink1Description=https://datasheet.octopart.com:443/217179-0001-Molex-datasheet-158871109.pdf?src-supplier=ODG+(Origin+Data+Global), ComponentLink1URL=https://datasheet.octopart.com:443/217179-0001-Molex-datasheet-158871109.pdf?src-supplier=ODG+(Origin+Data+Global), ComponentLink2Description=https://sigma.octopart.com:443/158871110/technical_drawing/Molex-217179-0001.pdf?src-supplier=Upverter, ComponentLink2URL=https://sigma.octopart.com:443/158871110/technical_drawing/Molex-217179-0001.pdf?src-supplier=Upverter, ComponentLink3Description=https://datasheet.octopart.com:443/217179-0001-Molex-datasheet-164573281.pdf?src-supplier=RS+(Formerly+Allied+Electronics), ComponentLink3URL=https://datasheet.octopart.com:443/217179-0001-Molex-datasheet-164573281.pdf?src-supplier=RS+(Formerly+Allied+Electronics), ComponentLink4Description=http://sigma.octopart.com:80/reach_statement/Molex-company-74.pdf?src-supplier=Compliance+Statements, ComponentLink4URL=http://sigma.octopart.com:80/reach_statement/Molex-company-74.pdf?src-supplier=Compliance+Statements, ComponentLink5Description=http://sigma.octopart.com:80/rohs_statement/Molex-company-73.pdf?src-supplier=Compliance+Statements, ComponentLink5URL=http://sigma.octopart.com:80/rohs_statement/Molex-company-73.pdf?src-supplier=Compliance+Statements, ComponentLink6Description=http://sigma.octopart.com:80/conflict_mineral_statement/Molex-company-72.pdf?src-supplier=Compliance+Statements, ComponentLink6URL=http://sigma.octopart.com:80/conflict_mineral_statement/Molex-company-72.pdf?src-supplier=Compliance+Statements, Contact Material="Gold, Nickel", Country of Origin="Mainland China", Export Control Classification Number (ECCN) Code=EAR99, Gender=Female, Harmonized Tariff Schedule (HTS) Code=8536.69.40.30, Height=3.36mm, Introduction Date=2021-08-30, Lifecycle Status=Production, MP=2171790001, Number of Contacts=16, Number of Ports=1, Number of Positions=16, Number of Rows=1, Orientation="Right Angle", Price=None, Pricing 1="7200=0.4445, 21600=0.38415, 43200=0.3822, 86400=0.38025, 201600=0.3783 (USD)", REACH SVHC=Yes, RoHS=Compliant, Shell Finish=Nickel, Shell Material="Stainless Steel", Stock 1=28800, Supplier 1=Avnet, Terminal Pitch=500µm, USB Standard="USB 2.0"
J2 J3: "KK 254 Breakaway Header, Vertical, 24 Circuits, 0.38µm Gold (Au) Plating, Mating Pin Length 7.49mm, Bag", Color=Black, Contact Resistance=10mΩ, Current Rating=4A, Insulation Resistance=1GΩ, Manufacturer=Molex, Manufacturer Lifecycle Status=ACTIVE, Manufacturer Part Number=22-28-4245, Max Operating Temperature=75°C, Min Operating Temperature=-40°C, Operating Force=4.9N, Package=None, Ratings=CSA, Supplier Part Number 1=900-0022284245-ND, Category="Headers and Wire Housings", Check_prices=https://www.snapeda.com/parts/22-28-4245/Molex/view-part/?ref=eda, China RoHS=Compliant, ComponentLink1Description=https://datasheet.octopart.com:443/22-28-4245-Molex-datasheet-166051265.pdf?src-supplier=IHS, ComponentLink1URL=https://datasheet.octopart.com:443/22-28-4245-Molex-datasheet-166051265.pdf?src-supplier=IHS, ComponentLink2Description=https://datasheet.octopart.com:443/022284245-Molex-datasheet-8337137.pdf?src-supplier=Arrow+Electronics, ComponentLink2URL=https://datasheet.octopart.com:443/022284245-Molex-datasheet-8337137.pdf?src-supplier=Arrow+Electronics, ComponentLink3Description=https://datasheet.octopart.com:443/22-28-4245-Molex-datasheet-16300812.pdf?src-supplier=Molex, ComponentLink3URL=https://datasheet.octopart.com:443/22-28-4245-Molex-datasheet-16300812.pdf?src-supplier=Molex, ComponentLink4Description=https://sigma.octopart.com:443/16300370/technical_drawing/Molex-22-28-4245.pdf?src-supplier=Molex, ComponentLink4URL=https://sigma.octopart.com:443/16300370/technical_drawing/Molex-22-28-4245.pdf?src-supplier=Molex, ComponentLink5Description=https://datasheet.octopart.com:443/22-28-4245-Molex-datasheet-4210.pdf?src-supplier=DigiKey, ComponentLink5URL=https://datasheet.octopart.com:443/22-28-4245-Molex-datasheet-4210.pdf?src-supplier=DigiKey, ComponentLink6Description=http://sigma.octopart.com:80/16300813/rohs_statement/Molex-22-28-4245.pdf?src-supplier=Compliance+Statements, ComponentLink6URL=http://sigma.octopart.com:80/16300813/rohs_statement/Molex-22-28-4245.pdf?src-supplier=Compliance+Statements, ComponentLink7Description=http://sigma.octopart.com:80/reach_statement/Molex-company-74.pdf?src-supplier=Compliance+Statements, ComponentLink7URL=http://sigma.octopart.com:80/reach_statement/Molex-company-74.pdf?src-supplier=Compliance+Statements, ComponentLink8Description=http://sigma.octopart.com:80/rohs_statement/Molex-company-73.pdf?src-supplier=Compliance+Statements, ComponentLink8URL=http://sigma.octopart.com:80/rohs_statement/Molex-company-73.pdf?src-supplier=Compliance+Statements, ComponentLink9Description=http://sigma.octopart.com:80/conflict_mineral_statement/Molex-company-72.pdf?src-supplier=Compliance+Statements, ComponentLink9URL=http://sigma.octopart.com:80/conflict_mineral_statement/Molex-company-72.pdf?src-supplier=Compliance+Statements, Contact Material=Brass, Contact Plating=Gold, Country of Origin=US, Export Control Classification Number (ECCN) Code=EAR99, Gender=Male, Harmonized Tariff Schedule (HTS) Code=8536.69.40.40, Housing Color=Black, Insulation Color=Black, Introduction Date=1994-12-01, Lead Free="Lead Free", Lifecycle Status=Production, MF=Molex, Mount="Through Hole", MP=22-28-4245, Number of Circuits=24, Number of Contacts=24, Number of Pins=24, Number of Positions=24, Number of Rows=1, Orientation=Vertical, Packaging=Bulk, Pitch=2.54mm, Plating=Tin, Plating Thickness=381nm, Pricing 1="1=4.05, 10=3.444, 100=2.9267, 500=2.61254, 1000=2.48792 (USD)", REACH SVHC=Yes, RoHS=Compliant, Schedule B="8536694040, 8536694040|8536694040|8536694040|8536694040|8536694040", SnapEDA_Link=https://www.snapeda.com/parts/22-28-4245/Molex/view-part/?ref=snap, Stock 1=574, Supplier 1=DigiKey, Terminal Pitch=2.54mm, Termination=Solder
J5: "Pin Header, Board-to-Board, 1.27 mm, 1 Rows, 2 Contacts, Through Hole Straight, FTS Series", Manufacturer=Samtec, Manufacturer Lifecycle Status=PRODUCTION, Manufacturer Part Number=FTS-102-01-F-S, Category="Headers and Wire Housings", ComponentLink1Description=https://datasheet.octopart.com:443/FTS-102-01-F-S-Samtec-datasheet-97029283.pdf?src-supplier=Newark, ComponentLink1URL=https://datasheet.octopart.com:443/FTS-102-01-F-S-Samtec-datasheet-97029283.pdf?src-supplier=Newark, ComponentLink2Description=https://sigma.octopart.com:443/97029285/technical_drawing/Samtec-FTS-102-01-F-S.pdf?src-supplier=Newark, ComponentLink2URL=https://sigma.octopart.com:443/97029285/technical_drawing/Samtec-FTS-102-01-F-S.pdf?src-supplier=Newark, ComponentLink3Description=https://datasheet.octopart.com:443/FTS-102-01-F-S-Samtec-datasheet-118493358.pdf?src-supplier=Electro+Sonic, ComponentLink3URL=https://datasheet.octopart.com:443/FTS-102-01-F-S-Samtec-datasheet-118493358.pdf?src-supplier=Electro+Sonic, ComponentLink4Description=https://datasheet.octopart.com:443/FTS-102-01-F-S-Samtec-datasheet-165596534.pdf?src-supplier=JRH+Electronics, ComponentLink4URL=https://datasheet.octopart.com:443/FTS-102-01-F-S-Samtec-datasheet-165596534.pdf?src-supplier=JRH+Electronics, ComponentLink5Description=https://datasheet.octopart.com:443/FTS-102-01-F-S-Samtec-datasheet-176663378.pdf?src-supplier=Toby+Electronics, ComponentLink5URL=https://datasheet.octopart.com:443/FTS-102-01-F-S-Samtec-datasheet-176663378.pdf?src-supplier=Toby+Electronics, ComponentLink6Description=https://datasheet.octopart.com:443/FTS-102-01-F-S-Samtec-datasheet-116535195.pdf?src-supplier=Toby+Electronics, ComponentLink6URL=https://datasheet.octopart.com:443/FTS-102-01-F-S-Samtec-datasheet-116535195.pdf?src-supplier=Toby+Electronics, ComponentLink7Description=https://datasheet.octopart.com:443/FTS-102-01-F-S-Samtec-datasheet-136395376.pdf?src-supplier=Toby+Electronics, ComponentLink7URL=https://datasheet.octopart.com:443/FTS-102-01-F-S-Samtec-datasheet-136395376.pdf?src-supplier=Toby+Electronics, ComponentLink8Description=https://datasheet.octopart.com:443/FTS-102-01-F-S-Samtec-datasheet-151470456.pdf?src-supplier=Sager+Electronics, ComponentLink8URL=https://datasheet.octopart.com:443/FTS-102-01-F-S-Samtec-datasheet-151470456.pdf?src-supplier=Sager+Electronics, Contact Plating=Gold, Gender=Male, Lifecycle Status=Production, Mount="Through Hole", Number of Contacts=2, Number of Rows=1, Packaging=Bulk, Pitch=1.27mm, Pricing 1="1=0.487, 50=0.425, 100=0.361, 500=0.299, 1000=0.256, 2000=0.21, 5000=0.166 (USD)", Radiation Hardening=No, RoHS=Compliant, Stock 1=6785, Supplier 1="Arrow Electronics", Supplier Part Number 1=FTS-102-01-F-S, Termination=Solder
J6: library part "Connector Header", "SAMTEC-FTS-103-01-X-S Connector Header Surface Mount 3 position 0.050 (1.27mm)", Package=None, Availability=Bad, MF=Samtec, MP=FTS-103-01-F-S, Price=None, SnapEDA_Link=https://www.snapeda.com/parts/FTS-103-01-F-S/Samtec/view-part/4834413/?ref=snap, Toby_UK-Purchase-URL=https://snapeda.com/shop?store=Toby+UK&id=4834413
Q1 Q2: "TRANS NPN 25V 1.5A SOT23-3 / Bipolar (BJT) Transistor NPN 25 V 1.5 A 100MHz 300 mW Surface Mount SOT-23-3", Case/Package=TO-236-3, Collector Base Voltage (VCBO)=40V, Collector Emitter Breakdown Voltage=25V, Collector Emitter Saturation Voltage=500mV, Emitter Base Voltage (VEBO)=5V, Manufacturer=Comchip, Max Collector Current=1.5A, Max Junction Temperature (Tj)=150°C, Max Power Dissipation=300mW, Package=None, Supplier Part Number 1=641-1790-6-ND, Transition Frequency=100MHz, Category=BJTs, Check_prices=https://www.snapeda.com/parts/SS8050G/Comchip/view-part/?ref=eda, Collector Emitter Voltage (VCEO)=25V, ComponentLink1Description=https://datasheet.octopart.com:443/SS8050-G-Comchip-datasheet-180131983.pdf?src-supplier=IHS, ComponentLink1URL=https://datasheet.octopart.com:443/SS8050-G-Comchip-datasheet-180131983.pdf?src-supplier=IHS, ComponentLink2Description=https://datasheet.octopart.com:443/SS8050-G-Comchip-datasheet-155422643.pdf?src-supplier=Upverter, ComponentLink2URL=https://datasheet.octopart.com:443/SS8050-G-Comchip-datasheet-155422643.pdf?src-supplier=Upverter, ComponentLink3Description=https://datasheet.octopart.com:443/SS8050-G-Comchip-datasheet-189767092.pdf?src-supplier=LCSC, ComponentLink3URL=https://datasheet.octopart.com:443/SS8050-G-Comchip-datasheet-189767092.pdf?src-supplier=LCSC, Digi-Key_Part_Number=641-1790-2-ND, Height=1.15mm, hFE Min=40, Lifecycle Status=Production, Manufacturer Part Number=SS8050-G, Max Breakdown Voltage=25V, Max Operating Temperature=150°C, MF=Comchip, Mount="Surface Mount", MP=SS8050G, Number of Elements=1, Number of Terminals=3, Power Dissipation=300mW, Pricing 1="1=0.26, 10=0.157, 100=0.0976, 500=0.0716, 1000=0.06315 (USD)", REACH SVHC=Yes, RoHS=Compliant, Schedule B=8541100070|8541100070|8541100070|8541100070|8541100070, SnapEDA_Link=https://www.snapeda.com/parts/SS8050G/Comchip/view-part/?ref=snap, Stock 1=118254, Supplier 1=DigiKey
R1 R2 R3 R10 R16 R17 R23 R24 R25 R26: library part Jumper-RC0402JR-070RL, "0 Ohms Jumper 0.063W, 1/16W Chip Resistor 0402 (1005 Metric) Moisture Resistant Thick Film RC0402JR-070RL", Package="0402 Yageo", Check_prices=https://www.snapeda.com/parts/RC0402JR-070RL/Yageo/view-part/?ref=eda, datasheet=https://yageogroup.com/content/datasheet/asset/file/PYU-RC_GROUP_51_ROHS_L, Digi-Key_Part_Number=311-0.0JRTR-ND, MF=Yageo, MP=RC0402JR-070RL, Purchase-URL=https://pricing.snapeda.com/search/part/RC0402JR-070RL/?ref=eda, SnapEDA_Link=https://www.snapeda.com/parts/RC0402JR-070RL/Yageo/view-part/?ref=snap
R4 R5: library part RC0402FR-071KL, "1 kOhms Â±1% 0.063W, 1/16W Chip Resistor 0402 (1005 Metric) Moisture Resistant Thick Film", Package="0402-2 YAGEO", Check_prices=https://www.snapeda.com/parts/RC0402FR071KL/Yageo/view-part/?ref=eda, MF="Yageo Corporation", MP=RC0402FR071KL, SnapEDA_Link=https://www.snapeda.com/parts/RC0402FR071KL/Yageo/view-part/?ref=snap
R6 R7 R14 R15: library part 5K1-AC0402FR, "5.1 kOhms ±1% 0.063W, 1/16W Chip Resistor 0402 (1005 Metric) Automotive AEC-Q200, Moisture Resistant Thick Film", Case Code (Imperial)=0402, Case Code (Metric)=1005, Manufacturer="Yageo Group", Max Operating Temperature=155°C, Max Power Dissipation=63mW, Min Operating Temperature=-55°C, Package="1005 Yageo", Power Rating=62.5mW, Ratings=AEC-Q200, Resistance=5.1kΩ, Temperature Coefficient=100ppm/°C, Tolerance=1%, Voltage Rating=50V, Case/Package=0402, Category="Chip SMD Resistors", Check_prices=https://www.snapeda.com/parts/AC0402FR-075K1L/Yageo/view-part/?ref=eda, China RoHS=Non-Compliant, ComponentLink1Description=https://datasheet.octopart.com:443/AC0402FR-075K1L-Yageo-datasheet-182189377.pdf?src-supplier=IHS, ComponentLink1URL=https://datasheet.octopart.com:443/AC0402FR-075K1L-Yageo-datasheet-182189377.pdf?src-supplier=IHS, ComponentLink2Description=https://datasheet.octopart.com:443/AC0402FR-075K1L-Yageo-datasheet-83209224.pdf?src-supplier=Upverter, ComponentLink2URL=https://datasheet.octopart.com:443/AC0402FR-075K1L-Yageo-datasheet-83209224.pdf?src-supplier=Upverter, ComponentLink3Description=https://datasheet.octopart.com:443/AC0402FR-075K1L-Yageo-datasheet-178509465.pdf?src-supplier=Newark, ComponentLink3URL=https://datasheet.octopart.com:443/AC0402FR-075K1L-Yageo-datasheet-178509465.pdf?src-supplier=Newark, ComponentLink4Description=https://datasheet.octopart.com/AC0402FR-075K1L-Yageo-datasheet-12512238.pdf, ComponentLink4URL=https://datasheet.octopart.com/AC0402FR-075K1L-Yageo-datasheet-12512238.pdf, ComponentLink5Description=https://datasheet.octopart.com:443/AC0402FR-075K1L-Yageo-Group-datasheet-189830439.pdf?src-supplier=Future+Electronics, ComponentLink5URL=https://datasheet.octopart.com:443/AC0402FR-075K1L-Yageo-Group-datasheet-189830439.pdf?src-supplier=Future+Electronics, ComponentLink6Description=https://datasheet.octopart.com:443/AC0402FR-075K1L-Yageo-datasheet-166720450.pdf?src-supplier=Future+Electronics, ComponentLink6URL=https://datasheet.octopart.com:443/AC0402FR-075K1L-Yageo-datasheet-166720450.pdf?src-supplier=Future+Electronics, ComponentLink7Description=https://datasheet.octopart.com:443/AC0402FR-075K1L-Yageo-datasheet-151884373.pdf?src-supplier=Future+Electronics, ComponentLink7URL=https://datasheet.octopart.com:443/AC0402FR-075K1L-Yageo-datasheet-151884373.pdf?src-supplier=Future+Electronics, ComponentLink8Description=https://datasheet.octopart.com:443/AC0402FR-075K1L-Yageo-datasheet-137699919.pdf?src-supplier=Future+Electronics, ComponentLink8URL=https://datasheet.octopart.com:443/AC0402FR-075K1L-Yageo-datasheet-137699919.pdf?src-supplier=Future+Electronics, ComponentLink9Description=https://datasheet.octopart.com:443/AC0402FR-075K1L-Yageo-datasheet-24580492.pdf?src-supplier=Future+Electronics, ComponentLink9URL=https://datasheet.octopart.com:443/AC0402FR-075K1L-Yageo-datasheet-24580492.pdf?src-supplier=Future+Electronics, ComponentLink10Description=https://datasheet.octopart.com:443/AC0402FR-075K1L-Yageo-datasheet-13029202.pdf?src-supplier=Future+Electronics, ComponentLink10URL=https://datasheet.octopart.com:443/AC0402FR-075K1L-Yageo-datasheet-13029202.pdf?src-supplier=Future+Electronics, ComponentLink11Description=https://datasheet.octopart.com:443/AC0402FR-075K1L-Yageo-Group-datasheet-188689268.pdf?src-supplier=LCSC, ComponentLink11URL=https://datasheet.octopart.com:443/AC0402FR-075K1L-Yageo-Group-datasheet-188689268.pdf?src-supplier=LCSC, ComponentLink12Description=https://datasheet.octopart.com:443/AC0402FR-075K1L-Yageo-Group-datasheet-164768995.pdf?src-supplier=ODG+(Origin+Data+Global), ComponentLink12URL=https://datasheet.octopart.com:443/AC0402FR-075K1L-Yageo-Group-datasheet-164768995.pdf?src-supplier=ODG+(Origin+Data+Global), ComponentLink13Description=http://sigma.octopart.com:80/conflict_mineral_statement/Yageo-company-3.pdf?src-supplier=Compliance+Statements, ComponentLink13URL=http://sigma.octopart.com:80/conflict_mineral_statement/Yageo-company-3.pdf?src-supplier=Compliance+Statements, ComponentLink14Description=http://sigma.octopart.com:80/rohs_statement/Yageo-company-2.pdf?src-supplier=Compliance+Statements, ComponentLink14URL=http://sigma.octopart.com:80/rohs_statement/Yageo-company-2.pdf?src-supplier=Compliance+Statements, Composition="Thick Film", Country of Origin="Mainland China, Taiwan", Depth=500µm, Export Control Classification Number (ECCN) Code=EAR99, Features="Automotive AEC-Q200, Moisture Resistant", Harmonized Tariff Schedule (HTS) Code=8533.21.00.30, Height=320µm, Introduction Date=2012-04-10, Lead Free="Lead Free", Length=1mm, Lifecycle Status=Production, Manufacturer Part Number=AC0402FR-075K1L, MF=Yageo, Military Standard=Not, Mount="Surface Mount", MP=AC0402FR-075K1L, Number of Terminals=2, Number of Terminations=2, Pricing 1="500=0.005, 5000=0.001 (GBP)", REACH SVHC=Yes, RoHS=Compliant, Schedule B="8533210045, 8533210045|8533210045|8533210045|8533210045|8533210045|8533210045|8533210045|8533210045|8533210045|8533210045|8533210045|8533210045|8533210045|8533210045|8533210045|8533210045|8533210045|8533210045|8533210045|8533210045|8533210045|8533210045|8533210045|85", SnapEDA_Link=https://www.snapeda.com/parts/AC0402FR-075K1L/Yageo/view-part/?ref=snap, Stock 1=2500, Supplier 1=RS, Width=500µm, Working Voltage=50V